# Altium PCB 风扇控制原理图.PcbDoc
Units mm, origin at the board's own origin, x right, y up, seen from the top; angles counter-clockwise.
Board outline 146.3 x 96.52 mm, 2 copper layers (Top Layer, Bottom Layer); 38 components, 56 nets, 160 pads, 16 vias.
Unrouted connection lines stored in the file: 4.
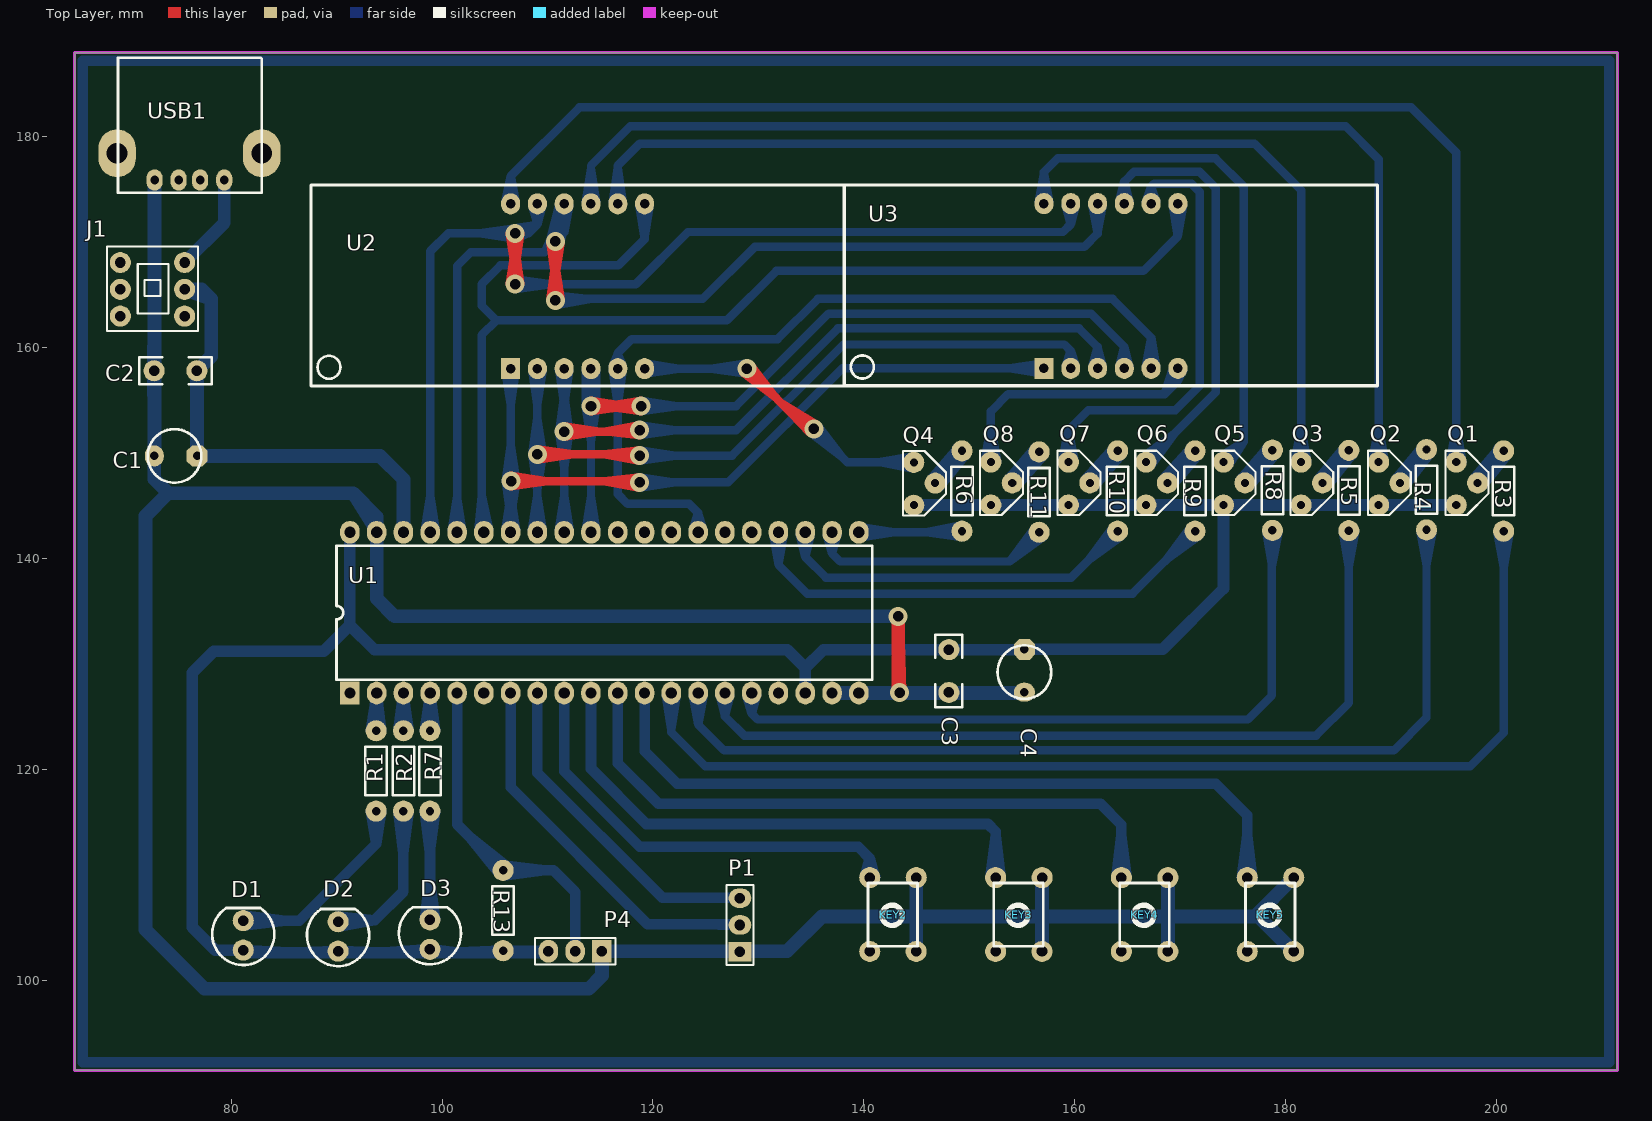
[diagram p0: Top Layer view]
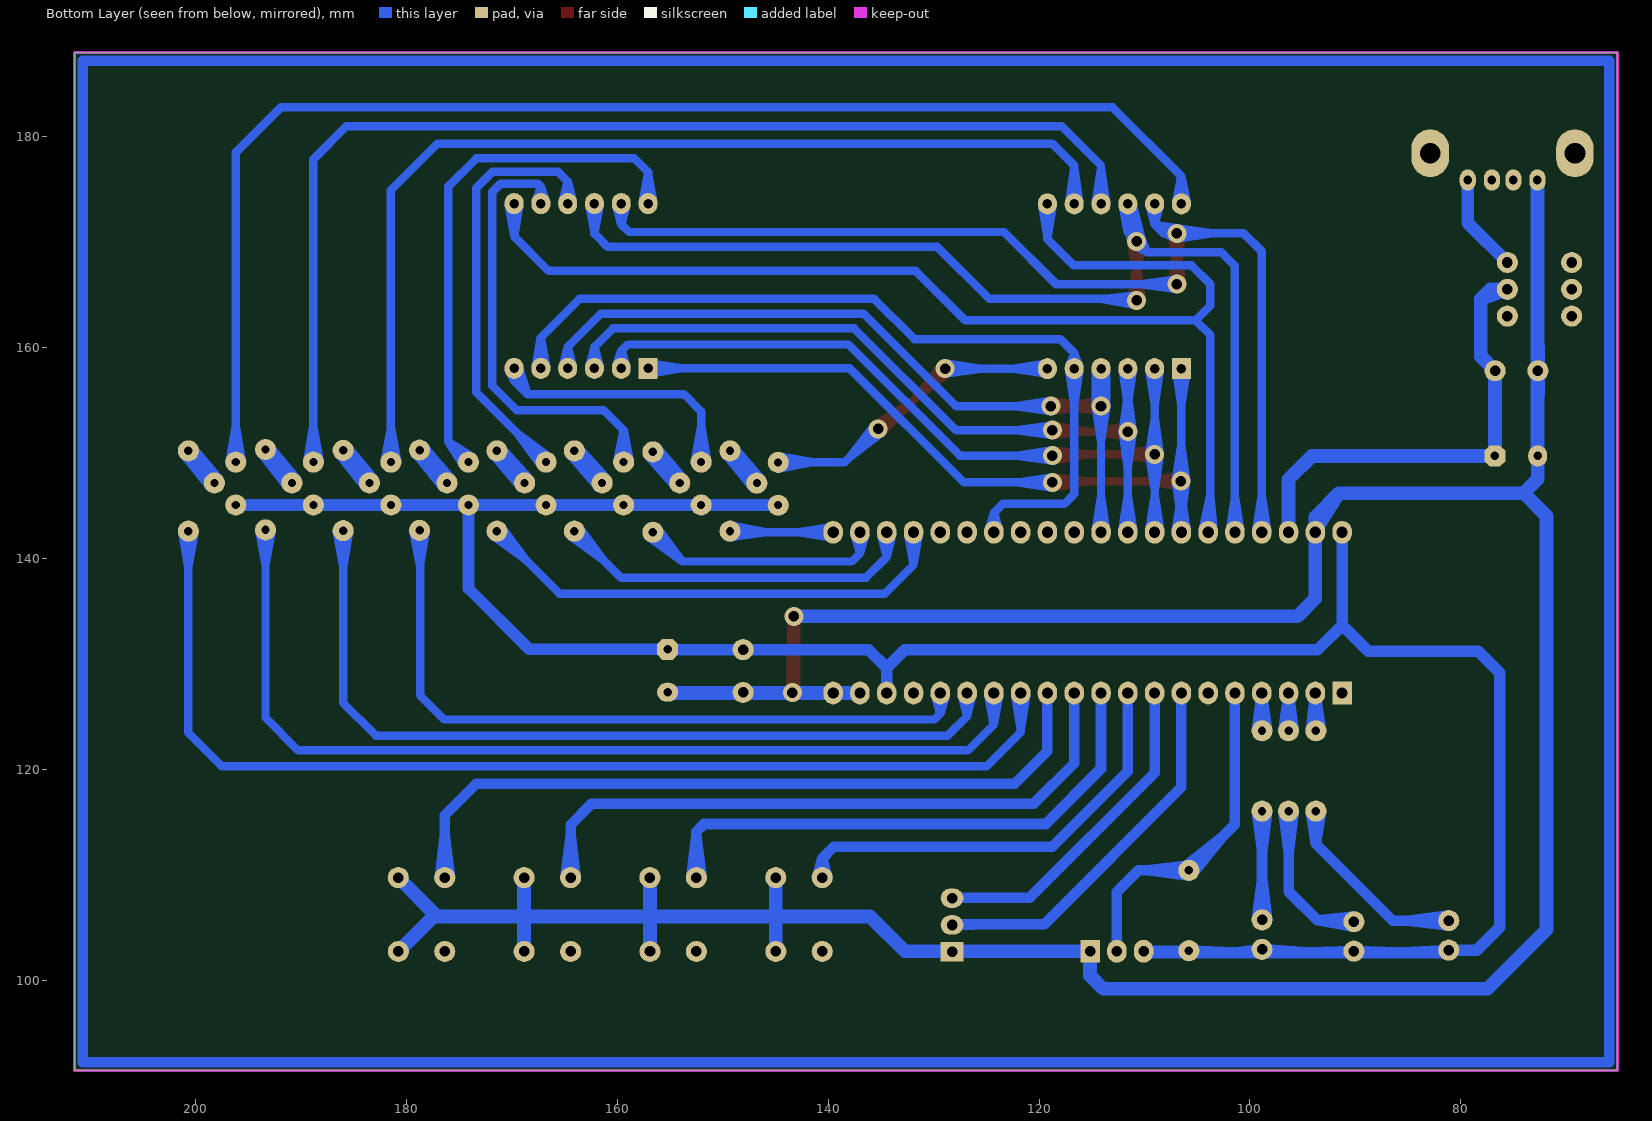
[diagram p1: Bottom Layer view, seen from below]

## Layer stack, top to bottom
Top Layer: signal copper 0.0356
Dielectric: dielectric 0.32, FR-4, Dk 4.8
Bottom Layer: signal copper 0.0356

## Board outline
65.151,91.44 65.151,187.96 211.455,187.96 211.455,91.44

## Design rules (kind name [scope] priority, off if disabled: settings)
Clearance [All] p1: gap=0.2
PolygonConnect [All] p1: connectstyle=Relief reliefconductorwidth=0.254 reliefentries=4 polygonreliefangle="90 Angle"
RoomDefinition 风扇控制原理图 [InComponentClass('风扇控制原理图')] p1: confinementstyle=ConfineIn formatcopy=TRUE lockcomponents=FALSE outline 0,0 50.8,0 50.8,25.4 0,25.4
RoutingCorners [All] p1: cornerstyle=45-Degree minsetback=0.4 maxsetback=0.4
RoutingVias [All] p1: holewidth=0.711 width=1.27 viastyle="Through Hole" minholewidth=0.711 minwidth=1.27 maxholewidth=0.711 maxwidth=1.27
SilkscreenOverComponentPads [All] p1: minsilkscreentomaskgap=0.254
SolderMaskExpansion [All] p1: expansion=0.102
TestPointUsage [All] p1: valid=0 allowmultiple=FALSE
Testpoint [All] p1: side=15 testpointundercomponent=TRUE minsize=1.016 maxsize=2.54 preferedsize=1.524 minholesize=0 maxholesize=1.016 preferedholesize=0.813 testpointgrid=0.025 style=1023 order=0-112345678
Width [All] p1: maxlimit=2 minlimit=0.6 preferedwidth=0.8
22 further rules are at their usual default settings.

## Components (designator, comment, footprint, x,y, rotation, side; value= is the part's Value field where it differs from the comment)
C1 "Cap" CAP-电解电容3.5 74.651,149.631 r180 top
C2 "C" CAP-瓷片电容 74.752,157.886 r180 top
C3 "C" CAP-瓷片电容 147.955,129.337 r270 top
C4 "Cap" CAP-电解电容3.5 155.296,129.235 r270 top
D1 "LED_5" LED-5MM 81.229,104.318 r270 top
D2 "LED_5" LED-5MM 90.221,104.216 r270 top
D3 "LED_5" LED-5MM 98.933,104.394 r270 top
J1 "SW" 8X8自锁开关 72.466,165.532 r180 top
KEY2 "BUTTON" KEY 142.723,106.147 r180 top
KEY3 "BUTTON" KEY 154.652,106.147 r180 top
KEY4 "BUTTON" KEY 166.582,106.147 r180 top
KEY5 "BUTTON" KEY 178.511,106.147 r180 top
P1 "风扇驱动" HEADER-3 128.245,105.232 r90 top
P4 "DS18B20" HEADER-3 112.624,102.743 r180 top
Q1 "NPN" TO-92 196.672,147.091 r270 top
Q2 "NPN" TO-92 189.317,147.091 r270 top
Q3 "NPN" TO-92 181.962,147.091 r270 top
Q4 "NPN" TO-92 145.237,147.066 r270 top
Q5 "NPN" TO-92 174.607,147.091 r270 top
Q6 "NPN" TO-92 167.252,147.091 r270 top
Q7 "NPN" TO-92 159.897,147.091 r270 top
Q8 "NPN" TO-92 152.542,147.091 r270 top
R1 "R" RES 93.701,119.863 r270 top
R2 "R" RES 96.291,119.863 r270 top
R3 "R" RES 200.609,146.406 r270 top
R4 "R" RES 193.294,146.533 r270 top
R5 "R" RES 186.03,146.406 r90 top
R6 "R" RES 149.352,146.355 r90 top
R7 "R" RES 98.806,119.863 r270 top
R8 "R" RES 178.689,146.482 r270 top
R9 "R" RES 171.348,146.406 r270 top
R10 "R" RES 164.109,146.355 r90 top
R11 "R" RES 156.667,146.253 r90 top
R13 "R" RES 105.74,106.629 r270 top
U1 "STM32F103C8T6" DIP40 115.24,135.077 r0 top
U2 "数码管" 0.56寸四位数码管 112.751,167.513 r0 top locked
U3 "数码管" 0.56寸四位数码管 163.322,167.538 r0 top locked
USB1 "USB" USB母座 76.048,180.188 r0 top

## Footprints (in the part's own frame and the unit in brackets; to place one, negate y for a bottom-side part, rotate by r counter-clockwise, add the part's x,y. Pads: shape width x height; smd on the part's side, far side on the other; paste and mask are expansions set on the pad)
0.56寸四位数码管 [mm]
  rect 1.8x2 hole 0.9: 1(-6.248,-9.525)
  oval 1.8x2 hole 0.9: 2(-3.708,-9.525) 3(-1.168,-9.525) 4(1.372,-9.525) 5(3.912,-9.525) 6(6.452,-9.525) 7(6.452,6.096) 8(3.912,6.096) 9(1.372,6.096) 10(-1.168,6.096) 11(-3.708,6.096) 12(-6.248,6.096)
  silkscreen extent -25.17,-11.18 25.37,7.87
8X8自锁开关 [mm]
  round 2 hole 1: 1(-3.124,2.565) 2(-3.124,0.025) 3(-3.124,-2.515) 4(2.972,-2.515) 5(2.972,0.025) 6(2.972,2.565)
  silkscreen extent -4.39,-4.04 4.24,3.96
CAP-瓷片电容 [mm]
  round 2 hole 1: 1(-2.007,0.102) 2(2.057,0.102)
  silkscreen extent -3.4,-1.17 3.45,1.37
CAP-电解电容3.5 [mm]
  oct 2x2 hole 0.8: 1(-2.134,-0.076)
  oval 1.8x2 hole 0.8: 2(1.93,-0.076)
  silkscreen extent -2.52,-2.62 2.57,2.46
DIP40 [mil]
  rect 72.83x84.65 hole 42: 1(-944,-309)
  oval 72.83x84.65 hole 42: 2(-844,-309) 3(-744,-309) 4(-644,-309) 5(-544,-309) 6(-444,-309) 7(-344,-309) 8(-244,-309) 9(-144,-309) 10(-44,-309) 11(56,-309) 12(156,-309) 13(256,-309) 14(356,-309) 15(456,-309) 16(556,-309) 17(656,-309) 18(756,-309) 19(856,-309) 20(956,-309) 21(956,291) 22(856,291) 23(756,291) 24(656,291) 25(556,291) 26(456,291) 27(356,291) 28(256,291) 29(156,291) 30(56,291) 31(-44,291) 32(-144,291) 33(-244,291) 34(-344,291) 35(-444,291) 36(-544,291) 37(-644,291) 38(-744,291) 39(-844,291) 40(-944,291)
  silkscreen extent -994,-259 1006,241
HEADER-3 [mm]
  rect 1.85x2.15 hole 1: 1(-2.54,0)
  oval 1.85x2.15 hole 1: 2(0,0) 3(2.54,0)
  silkscreen extent -3.81,-1.27 3.81,1.27
KEY [mm]
  round 2 hole 1: 1(-2.245,-3.576) 1(-2.235,3.424) 2(2.165,3.424) 2(2.165,-3.576)
  silkscreen extent -2.36,-3.07 2.34,2.93
LED-5MM [mm]
  round 2 hole 1: 1(1.467,-0.079) 2(-1.327,-0.079)
  silkscreen extent -2.53,-3.02 2.89,2.87
RES [mm]
  round 2 hole 0.8: 1(-3.785,0.051) 2(3.835,0.051)
  silkscreen extent -2.26,-0.97 2.31,1.07
TO-92 [mil]
  round 78.74 hole 30: 1(-80,-20) 2(-2.2,60) 3(80,-20)
  silkscreen extent -122,-60 118,100
USB母座 [mil]
  oval 60x78.74 hole 32: 1(130,-170) 2(40,-170) 3(-40,-170) 4(-130,-170)
  oval 139.37x178.74 hole 78: 5(-270,-70) 6(270,-70)
  silkscreen extent -266,-218 270,286

## Part data
P1 P4: library part "Header 3", "Header, 3-Pin"
U1: library part STC89C52
U2 U3: library part 四位共阳数码管

## Via types
v1: diameter 1.8, hole 1, Top Layer to Bottom Layer, 16 vias

## Nets (pads, with @x,y where several pads share a name; then routed paths per layer and width w, separated by ;. In a path a pad name is that pad's centre, name@x,y a point inside that pad or via, vN(x,y) a via of type N, cw(c..) or ccw(c..) an arc to the next point about the centre after c; other vN are vias at no path point)
3V3: C3.1 C4.1 D1.1 D2.1 D3.1 P4.3 Q1.3 Q2.3 Q3.3 Q4.3 Q5.3 Q6.3 Q7.3 Q8.3 R13.2 U1.18 U1.40 | length 290.9
  Bottom Layer w1.1: 85.472,102.616 D1.1 ; 85.834,102.616 D2.1 94.449,102.616 ; 91.262,138.094 U1.40@91.262,142.319 ; U1.40 91.262,133.655 ; 94.511,102.616 D3.1 101.346,102.616 ; 101.482,102.616 R13.2 P4.3@109.957,102.616 ; 103.505,102.616 101.346,102.616 ; R13.2@105.851,102.616 P4.3 ; R13.2@105.851,102.791 P4.3 ; U1.18 134.442,129.616 ; U1.18@134.442,127.379 134.442,129.616 ; 149.029,145.059 Q4.3 144.755,145.059 Q8.3 Q7.3 Q6.3 Q5.3 ; 150.919,131.343 C4.1 ; Q1.3 Q2.3 Q3.3 Q5.3 ; 78.505,102.851 76.327,105.029 76.327,129.159 78.359,131.191 88.798,131.191 91.262,133.655 ; 78.505,102.851 D1.1 ; 78.505,102.851 D1.1@80.791,102.851 ; D1.1@80.791,102.851 81.026,102.616 101.346,102.616 ; D1.1@80.791,102.851 D1.1 ; 91.262,133.655 93.599,131.318 132.74,131.318 134.442,129.616 ; 101.346,102.616 P4.3@109.957,102.616 ; P4.3@109.957,102.616 P4.3 ; 134.442,129.616 136.169,131.343 C3.1 155.194,131.343 C4.1 ; C4.1 168.326,131.369 174.099,137.142 Q5.3
GND: C1.2 C2.2 C3.2 C4.2 KEY2.1 KEY3.1 KEY4.1 KEY5.1 P1.1 P4.1 U1.19 U1.20 U1.39 USB1.4 | length 417
  Top Layer w1.3: v1@143.256,127.381 v1(143.256,134.493) ; 143.256,132.162 v1(143.383,127.254)
  Bottom Layer w1.3: C1.2@72.72,149.608 72.72,147.498 ; C1.2 72.72,147.498 ; C1.2@72.72,149.808 72.746,154.608 ; C1.2@72.746,149.708 USB1.4 ; 72.746,152.884 C2.2 72.746,162.686 ; 72.746,170.97 USB1.4@72.746,175.632 ; 93.802,137.494 U1.39@93.802,142.319 ; P4.1@115.164,102.593 115.164,100.432 ; 123.269,102.743 P1.1@128.095,102.692 ; P1.1@128.395,102.692 132.715,102.743 ; U1.19 U1.20 ; v1@143.156,127.229 C3.2 ; v1(143.256,134.493) 95.504,134.493 93.802,136.195 U1.39 93.802,143.942 ; KEY2.1@144.958,102.723 144.968,106.045 ; KEY2.1@144.968,102.733 144.968,106.045 ; KEY2.1@144.968,109.723 144.968,106.045 ; C3.2@148.285,127.229 v1(143.383,127.254) ; 150.317,127.229 C4.2@155.119,127.305 ; 152.958,127.229 C3.2 ; C4.2 155.143,127.229 U1.20 ; KEY3.1@156.887,102.723 156.897,106.045 ; KEY3.1@156.897,102.733 156.897,106.045 ; KEY3.1@156.897,109.723 156.897,106.045 ; KEY4.1@168.827,109.723 168.827,106.045 ; KEY5.1@180.487,109.992 KEY5.1@180.756,109.723 ; 72.72,147.498 74.041,146.177 ; 74.041,146.177 71.882,144.018 71.882,104.775 77.47,99.187 113.919,99.187 115.164,100.432 ; 74.041,146.177 91.567,146.177 ; 91.567,146.177 U1.39@93.802,142.619 ; 91.567,146.177 93.802,143.942 ; U1.39@93.802,142.619 93.802,143.942 ; U1.39@93.802,142.619 93.802,143.942 ; 115.164,100.432 P4.1 132.715,102.743 ; 132.715,102.743 136.017,106.045 144.968,106.045 ; U1.20 v1(143.383,127.254) ; v1(143.383,127.254) C3.2 ; 144.968,106.045 156.897,106.045 ; 156.897,106.045 168.827,106.045 ; 168.827,106.045 168.817,102.723 168.827,102.733 168.827,106.045 ; 168.827,106.045 177.079,106.045 ; 177.079,106.045 KEY5.1@180.756,109.723 ; 177.079,106.045 177.424,106.045 ; 177.079,106.045 KEY5.1@180.756,109.723 ; 177.424,106.045 180.746,102.723 177.424,106.045
NetD1_2: D1.2 R1.2 | length 32.9
  Bottom Layer w1: D1.2 86.468,105.645 93.751,112.928 ; D1.2@81.181,105.146 85.15,105.645 D1.2@81.181,106.144 ; R1.2@93.253,115.987 93.751,112.928 ; R1.2 93.751,112.928 ; R1.2@94.25,115.987 93.751,112.928
NetD2_2: D2.2 R2.2 | length 38.3
  Bottom Layer w1: D2.2@90.16,106.043 93.599,105.664 ; D2.2@90.195,105.046 93.599,105.664 ; R2.2@95.843,115.996 96.342,112.027 R2.2@96.841,115.996 ; R2.2@95.848,115.951 96.342,114.376 ; R2.2@96.836,115.951 96.342,114.376 ; 93.599,105.664 D2.2 90.262,105.664 93.599,105.664 ; 93.599,105.664 96.342,108.407 R2.2 96.342,114.376
NetD3_2: D3.2 R7.2 | length 31
  Bottom Layer w1: D3.2@98.355,105.753 98.857,109.721 ; R7.2@98.358,115.995 98.857,112.141 ; 98.857,111.176 98.857,112.141 ; R7.2 98.857,112.141 ; D3.2@99.353,105.752 98.857,109.721 ; R7.2@99.356,115.995 98.857,112.141 ; 98.857,109.721 D3.2 98.857,105.724 98.857,112.141
NetJ1_3: J1.3 USB1.1 | length 13.2
  Bottom Layer w1.2: J1.3 79.35,171.806 ; USB1.1@79.35,175.632 79.35,171.806 ; USB1.1 79.35,171.806
NetQ1_1: Q1.1 U2.12 | length 140.5
  Bottom Layer w0.8: U2.12@106.005,173.759 106.502,176.225 ; U2.12 106.502,176.225 ; U2.12@106.502,173.709 106.502,176.225 ; U2.12@107,173.759 106.502,176.225 ; Q1.1@195.567,149.176 196.164,152.523 Q1.1@196.762,149.176 ; Q1.1 196.164,178.486 191.897,182.753 113.03,182.753 106.502,176.225
NetQ1_2: Q1.2 R3.1 | length 55.3
  Bottom Layer w0.8: Q1.2@197.705,147.492 R3.1@199.99,150.22 ; Q1.2@197.762,147.562 R3.1@200.517,150.012 ; Q1.2@197.81,147.607 R3.1@200.66,149.611 ; Q1.2@197.83,147.623 R3.1@200.973,149.667 ; Q1.2@198.634,146.737 R3.1@200.973,149.667 ; Q1.2@198.655,146.761 R3.1@200.66,149.611 ; Q1.2@198.692,146.809 R3.1@200.517,150.012 ; Q1.2@198.738,146.89 R3.1@199.99,150.22 ; R3.1@200.163,150.527 Q1.2@198.318,147.269 ; R3.1@201.097,149.779 Q1.2@198.318,147.269 ; Q1.2 R3.1@200.517,150.012 ; Q1.2 R3.1@199.99,150.22 ; Q1.2 R3.1@200.973,149.667 ; Q1.2 R3.1@200.66,149.611 ; Q1.2@198.318,147.269 R3.1 R3.1@200.66,149.611
NetQ2_1: Q2.1 U2.9 | length 126.6
  Bottom Layer w0.8: U2.9@113.624,173.747 114.122,177.009 ; U2.9 114.122,177.241 117.856,180.975 185.674,180.975 188.809,177.84 Q2.1 ; U2.9@114.122,173.709 114.122,177.009 ; U2.9@114.621,173.747 114.122,177.009 ; Q2.1@188.211,149.176 188.809,152.523 Q2.1@189.407,149.176
NetQ2_2: Q2.2 R4.1 | length 55.6
  Bottom Layer w0.8: Q2.2@190.348,147.49 R4.1@192.615,150.228 ; Q2.2@190.403,147.557 R4.1@193.121,150.029 ; Q2.2@190.454,147.606 R4.1@193.345,149.651 ; Q2.2@190.467,147.616 R4.1@193.591,149.729 ; Q2.2@191.285,146.744 R4.1@193.591,149.729 ; Q2.2@191.3,146.761 R4.1@193.345,149.651 ; Q2.2@191.34,146.815 R4.1@193.121,150.029 ; Q2.2@191.384,146.893 R4.1@192.615,150.228 ; R4.1@192.843,150.646 Q2.2@191.041,147.348 ; R4.1@193.788,149.913 Q2.2@191.041,147.348 ; Q2.2 R4.1@193.121,150.029 ; Q2.2 R4.1@192.615,150.228 ; Q2.2 R4.1@193.591,149.729 ; Q2.2 R4.1@193.345,149.651 ; Q2.2@191.041,147.348 R4.1 R4.1@193.345,149.651
NetQ3_1: Q3.1 U2.8 | length 113.6
  Bottom Layer w0.8: U2.8@116.164,173.747 116.662,177.009 ; U2.8 116.662,177.241 118.745,179.324 177.038,179.324 181.454,174.908 Q3.1 ; U2.8@116.662,173.709 116.662,177.009 ; U2.8@117.161,173.747 116.662,177.009 ; Q3.1@180.856,149.176 181.454,152.523 Q3.1@182.052,149.176
NetQ3_2: Q3.2 R5.2 | length 55.4
  Bottom Layer w0.8: Q3.2@182.995,147.493 R5.2@185.281,150.22 ; Q3.2@183.051,147.561 R5.2@185.799,150.015 ; Q3.2@183.099,147.606 R5.2@185.979,149.64 ; Q3.2@183.117,147.621 R5.2@186.256,149.684 ; Q3.2@183.925,146.739 R5.2@186.256,149.684 ; Q3.2@183.945,146.761 R5.2@185.979,149.64 ; Q3.2@183.982,146.81 R5.2@185.799,150.015 ; Q3.2@184.028,146.889 R5.2@185.281,150.22 ; R5.2@185.481,150.576 Q3.2@183.646,147.307 ; R5.2@186.417,149.831 Q3.2@183.646,147.307 ; Q3.2 R5.2@185.799,150.015 ; Q3.2 R5.2@185.281,150.22 ; Q3.2 R5.2@186.256,149.684 ; Q3.2 R5.2@185.979,149.64 ; Q3.2@183.646,147.307 R5.2 R5.2@185.979,149.64
NetQ4_1: Q4.1 U2.6 | length 83.9
  Top Layer w0.8: v1@128.575,157.612 131.604,155.289 v1@129.281,158.318 ; v1(128.905,157.988) 134.62,152.273 v1(135.255,152.273) 132.235,154.658 ; v1@134.92,151.902 132.235,154.658 ; v1@135.539,152.685 132.235,154.658
  Bottom Layer w0.8: U2.6 v1(128.905,157.988) 125.503,157.988 ; U2.6@119.24,157.489 122.502,157.988 U2.6@119.24,158.487 ; v1@128.868,157.489 125.503,157.988 ; v1@128.868,158.487 125.503,157.988 ; v1@134.925,151.897 137.954,149.574 v1@135.631,152.603 ; v1(135.255,152.273) 138.405,149.123 Q4.1@143.764,149.123 ; Q4.1@144.672,148.501 141.323,149.123 ; Q4.1@144.678,149.123 Q4.1@143.764,149.123 ; Q4.1@144.681,149.696 141.323,149.123 ; 141.323,149.123 Q4.1 Q4.1@143.764,149.123
NetQ4_2: Q4.2 R6.2 | length 55.6
  Bottom Layer w0.8: Q4.2@146.275,147.474 R6.2@148.603,150.178 ; Q4.2@146.332,147.541 R6.2@149.121,149.97 ; Q4.2@146.374,147.58 R6.2@149.301,149.662 ; Q4.2@146.399,147.6 R6.2@149.551,149.613 ; Q4.2@147.195,146.708 R6.2@149.551,149.613 ; Q4.2@147.219,146.735 R6.2@149.301,149.662 ; Q4.2@147.253,146.778 R6.2@149.121,149.97 ; Q4.2@147.299,146.857 R6.2@148.603,150.178 ; R6.2@148.808,150.532 Q4.2@146.93,147.291 ; R6.2@149.734,149.774 Q4.2@146.93,147.291 ; Q4.2 R6.2@149.121,149.97 ; Q4.2 R6.2@148.603,150.178 ; Q4.2 R6.2@149.551,149.613 ; Q4.2 R6.2@149.301,149.662 ; Q4.2@146.93,147.291 R6.2 R6.2@149.301,149.662
NetQ5_1: Q5.1 U3.12 | length 64.7
  Bottom Layer w0.8: U3.12@156.575,173.778 157.074,176.632 ; U3.12 157.074,176.632 ; U3.12@157.074,173.734 157.074,176.632 ; U3.12@157.572,173.778 157.074,176.632 ; Q5.1@173.724,149.592 176.022,151.047 ; Q5.1 176.022,151.047 ; Q5.1@174.567,148.749 176.022,151.047 ; 157.074,176.632 158.369,177.927 173.355,177.927 176.022,175.26 176.022,151.047
NetQ5_2: Q5.2 R8.1 | length 60
  Bottom Layer w0.8: Q5.2@175.644,147.498 R8.1@177.988,150.245 ; Q5.2@175.766,147.624 R8.1@178.949,149.68 ; Q5.2@176.566,146.734 R8.1@178.949,149.68 ; Q5.2@176.669,146.883 R8.1@177.988,150.245 ; R8.1@178.282,150.655 Q5.2@176.131,147.657 ; R8.1@179.128,149.809 Q5.2@176.131,147.657 ; Q5.2 R8.1@178.513,150.04 ; Q5.2 R8.1@177.988,150.245 ; Q5.2 R8.1@178.949,149.68 ; Q5.2 R8.1@178.513,150.04 ; Q5.2 Q5.2@176.131,147.657 ; Q5.2@176.131,147.657 R8.1 Q5.2@176.131,147.657 ; R8.1@178.513,150.04 176.623,146.804 R8.1@178.513,150.04 ; R8.1@178.513,150.04 175.7,147.565 R8.1@178.513,150.04
NetQ6_1: Q6.1 U3.9 | length 54.2
  Bottom Layer w0.8: U3.9@164.197,173.797 164.694,175.743 ; U3.9 164.694,175.743 ; U3.9@164.694,173.734 164.694,175.743 ; U3.9@165.19,173.797 164.694,175.743 ; Q6.1@166.354,149.58 169.441,151.82 Q6.1@167.2,148.734 ; Q6.1 173.355,155.735 173.355,175.133 171.831,176.657 165.608,176.657 164.694,175.743
NetQ6_2: Q6.2 R9.1 | length 55.9
  Bottom Layer w0.8: Q6.2@168.297,147.509 R9.1@170.691,150.176 ; Q6.2@168.355,147.575 R9.1@171.206,149.964 ; Q6.2@168.387,147.605 R9.1@171.399,149.771 ; Q6.2@168.423,147.632 R9.1@171.595,149.572 ; Q6.2@169.202,146.726 R9.1@171.595,149.572 ; Q6.2@169.233,146.759 R9.1@171.399,149.771 ; Q6.2@169.26,146.793 R9.1@171.206,149.964 ; Q6.2@169.308,146.87 R9.1@170.691,150.176 ; R9.1@170.913,150.542 Q6.2@168.967,147.339 ; R9.1@171.823,149.766 Q6.2@168.967,147.339 ; Q6.2 R9.1@171.206,149.964 ; Q6.2 R9.1@171.595,149.572 ; Q6.2 R9.1@170.691,150.176 ; Q6.2 R9.1@171.399,149.771 ; Q6.2@168.967,147.339 R9.1 R9.1@171.399,149.771
NetQ7_1: Q7.1 U3.8 | length 52.8
  Bottom Layer w0.8: Q7.1@158.792,149.183 159.389,152.15 ; Q7.1 159.389,152.15 ; Q7.1@159.986,149.183 159.389,152.15 ; U3.8@166.741,173.818 167.234,175.235 ; U3.8 167.234,175.235 ; U3.8@167.234,173.734 167.234,175.235 ; U3.8@167.727,173.818 167.234,175.235 ; 159.389,152.15 161.29,154.051 169.545,154.051 171.831,156.337 171.831,174.752 171.069,175.514 167.513,175.514 167.234,175.235
NetQ7_2: Q7.2 R10.2 | length 55.9
  Bottom Layer w0.8: Q7.2@160.943,147.511 R10.2@163.346,150.172 ; Q7.2@161.001,147.576 R10.2@163.861,149.96 ; Q7.2@161.032,147.604 R10.2@164.059,149.785 ; Q7.2@161.069,147.633 R10.2@164.244,149.564 ; Q7.2@161.846,146.725 R10.2@164.244,149.564 ; Q7.2@161.878,146.759 R10.2@164.059,149.785 ; Q7.2@161.904,146.792 R10.2@163.861,149.96 ; Q7.2@161.952,146.869 R10.2@163.346,150.172 ; R10.2@163.573,150.543 Q7.2@161.618,147.345 ; R10.2@164.481,149.764 Q7.2@161.618,147.345 ; Q7.2 R10.2@163.861,149.96 ; Q7.2 R10.2@163.346,150.172 ; Q7.2 R10.2@164.244,149.564 ; Q7.2 R10.2@164.059,149.785 ; Q7.2@161.618,147.345 R10.2 R10.2@164.059,149.785
NetQ8_1: Q8.1 U3.6 | length 46.3
  Bottom Layer w0.8: Q8.1@151.436,149.176 152.034,152.523 Q8.1@152.631,149.176 ; Q8.1 152.034,153.939 153.67,155.575 168.529,155.575 ; U3.6@169.312,158.106 168.529,155.575 ; U3.6 169.774,156.82 ; U3.6@170.191,157.638 168.529,155.575 ; 168.529,155.575 U3.6@169.774,157.913 ; 168.529,155.575 169.774,156.82 ; 169.774,156.82 U3.6@169.774,157.913 ; 169.774,156.82 169.287,157.799 169.774,156.82 ; 169.774,156.82 170.26,157.799 169.774,156.82 ; 169.774,156.82 U3.6@169.774,157.913
NetQ8_2: Q8.2 R11.2 | length 44.5
  Bottom Layer w0.8: Q8.2@153.678,147.605 R11.2@156.616,149.698 ; Q8.2 R11.2@156.616,149.698 ; Q8.2@154.524,146.76 R11.2@156.616,149.698 ; R11.2@156.082,150.362 Q8.2@154.716,147.03 ; R11.2@156.132,150.443 Q8.2@154.17,147.252 ; R11.2@156.193,150.513 Q8.2@153.767,147.669 ; R11.2@156.967,149.602 Q8.2@153.767,147.669 ; R11.2@157.038,149.662 Q8.2@154.17,147.252 ; R11.2@157.098,149.731 Q8.2@154.716,147.03 ; Q8.2@153.767,147.669 R11.2 ; Q8.2@154.17,147.252 R11.2 ; Q8.2@154.716,147.03 R11.2 ; R11.2@156.616,149.698 R11.2
PA0: P4.2 R13.1 U1.5 | length 61
  Bottom Layer w1: 101.422,123.154 U1.5@101.422,127.079 ; U1.5 101.422,114.783 R13.1 ; R13.1@105.418,110.081 102.67,113.535 ; R13.1@105.822,109.915 109.791,110.414 R13.1@105.822,110.913 ; R13.1@106.124,110.787 102.67,113.535 ; P4.2 112.624,108.356 110.566,110.414 R13.1 ; P4.2@112.624,102.893 112.624,106.818 ; 102.67,113.535 R13.1
PA1: U1.6
PA2: P1.2 U1.7 | length 45.6
  Bottom Layer w1: 106.502,123.154 U1.7@106.502,127.079 ; U1.7 106.502,118.288 119.507,105.283 122.428,105.283 ; 124.13,105.283 122.428,105.283 ; 124.169,105.283 P1.2@128.095,105.232 ; P1.2 128.194,105.283 122.428,105.283
PA3: P1.3 U1.8 | length 41
  Bottom Layer w1: 109.042,123.154 U1.8@109.042,127.079 ; U1.8 109.042,119.685 120.904,107.823 122.682,107.823 ; 124.13,107.823 122.682,107.823 ; 124.169,107.823 P1.3@128.095,107.772 ; P1.3 128.194,107.823 122.682,107.823
PA4: KEY2.2 U1.9 | length 49.2
  Bottom Layer w1: 111.582,123.154 U1.9@111.582,127.079 ; U1.9 111.582,119.812 118.745,112.649 139.446,112.649 140.558,111.537 ; KEY2.2@140.063,109.792 140.558,111.537 ; KEY2.2@140.558,109.723 140.558,111.537 ; KEY2.2@141.053,109.792 140.558,111.537
PA5: KEY3.2 U1.10 | length 64.3
  Bottom Layer w1: 114.122,123.154 U1.10@114.122,127.079 ; U1.10 114.122,120.066 119.38,114.808 151.765,114.808 152.487,114.086 KEY3.2@152.487,109.723 ; KEY3.2@151.988,109.754 152.487,113.723 KEY3.2@152.986,109.754
PA6: KEY4.2 U1.11 | length 73.8
  Bottom Layer w1: 116.662,123.154 U1.11@116.662,127.079 ; U1.11 116.662,120.574 120.523,116.713 162.433,116.713 164.417,114.729 KEY4.2@164.417,109.723 ; KEY4.2@163.918,109.754 164.417,113.723 KEY4.2@164.916,109.754
PA7: KEY5.2 U1.12 | length 83
  Bottom Layer w1: 119.202,123.154 U1.12@119.202,127.079 ; U1.12 119.202,121.717 122.301,118.618 173.355,118.618 176.346,115.627 KEY5.2@176.346,109.723 ; KEY5.2@175.847,109.754 176.346,113.723 KEY5.2@176.845,109.754
PA8: U1.25
PA9: U1.26
PA10: U1.27 U2.5 U3.5 | length 108.3
  Bottom Layer w0.8: U2.5@116.164,157.85 116.662,154.588 ; U2.5@116.171,158.179 116.662,159.461 ; U2.5@116.662,157.888 116.662,154.588 ; U2.5@116.662,158.088 116.662,159.461 ; U2.5@117.154,158.179 116.662,159.461 ; U2.5@117.161,157.85 116.662,154.588 ; U1.27@123.763,142.699 124.282,144.323 ; U1.27 124.282,144.323 ; U1.27@124.282,142.619 124.282,144.323 ; U1.27@124.801,142.699 124.282,144.323 ; U3.5@166.736,158.158 167.234,160.934 ; U3.5 167.234,160.934 ; U3.5@167.234,158.113 167.234,160.934 ; U3.5@167.732,158.158 167.234,160.934 ; 116.662,159.461 117.983,160.782 131.826,160.782 135.636,164.592 163.576,164.592 167.234,160.934 ; 116.662,159.461 U2.5 116.662,146.101 117.602,145.161 123.444,145.161 124.282,144.323
PA11: U1.28
PA12: U1.29
PA15: U1.30
PB0: R3.2 U1.13 | length 121.2
  Bottom Layer w0.8: U1.13@121.219,127.037 121.742,123.754 ; U1.13@121.742,127.079 121.742,123.754 ; U1.13 121.742,123.495 124.968,120.269 197.485,120.269 200.66,123.444 R3.2 ; U1.13@122.266,127.037 121.742,123.754 ; R3.2@200.062,142.517 200.66,139.17 R3.2@201.258,142.517
PB1: R4.2 U1.14 | length 107.4
  Bottom Layer w0.8: U1.14@123.759,127.03 124.282,124.257 ; U1.14@124.282,127.079 124.282,124.257 ; U1.14 124.282,124.257 ; U1.14@124.805,127.03 124.282,124.257 ; R4.2@192.747,142.644 193.345,139.297 R4.2@193.942,142.644 ; R4.2 193.345,124.892 190.246,121.793 126.746,121.793 124.282,124.257
PB3: U1.31 U2.4 U3.4 | length 163.4
  Top Layer w0.8: v1(114.122,154.432) v1(118.872,154.432) ; v1@114.159,153.933 117.524,154.432 v1@114.159,154.931 ; v1@118.835,153.933 115.47,154.432 v1@118.835,154.931
  Bottom Layer w0.8: U1.31@113.599,142.66 114.122,145.944 ; v1@113.624,154.395 114.122,151.03 v1@114.621,154.395 ; v1@113.623,154.396 U2.4@113.63,157.809 ; U2.4@113.624,157.85 v1@114.122,154.588 ; v1@113.634,154.54 U2.4@114.614,157.809 ; U1.31 U2.4 ; U1.31@114.122,142.619 114.122,145.944 ; U2.4@114.122,157.888 v1@114.122,154.588 ; v1@114.61,154.54 U2.4@113.63,157.809 ; v1@114.621,154.396 U2.4@114.614,157.809 ; U2.4@114.621,157.85 v1@114.122,154.588 ; U1.31@114.646,142.66 114.122,145.944 ; v1(118.872,154.432) 127.889,154.432 136.652,163.195 161.544,163.195 164.694,160.045 ; v1@118.909,153.933 122.274,154.432 v1@118.909,154.931 ; U3.4@164.198,158.178 164.694,160.045 ; U3.4 164.694,160.045 ; U3.4@164.694,158.113 164.694,160.045 ; U3.4@165.189,158.178 164.694,160.045 ; U2.4@113.63,157.809 v1(114.122,154.432) ; v1(114.122,154.432) U2.4@114.614,157.809 ; v1(114.122,154.432) U2.4@114.122,157.834 ; U2.4@114.122,157.834 114.621,154.469 U2.4@114.122,157.834 ; U2.4@114.122,157.834 113.624,154.469 U2.4@114.122,157.834
PB4: U1.32 U2.3 U3.3 | length 136
  Top Layer w0.8: v1(111.582,152.019) 118.618,152.019 v1(118.745,152.146) 115.337,152.019 ; v1@111.619,151.52 114.984,152.019 v1@111.619,152.518 ; v1@118.69,152.643 115.337,152.019 ; v1@118.727,151.646 115.337,152.019
  Bottom Layer w0.8: U1.32@111.059,142.66 111.582,145.944 ; v1@111.084,151.982 111.582,148.617 v1@112.081,151.982 ; v1@111.084,152.056 111.582,155.421 v1@112.081,152.056 ; U2.3@111.084,157.85 111.582,154.588 ; U1.32 U2.3 ; U1.32@111.582,142.619 111.582,145.944 ; U2.3@111.582,157.888 111.582,154.588 ; U2.3@112.081,157.85 111.582,154.588 ; U1.32@112.106,142.66 111.582,145.944 ; v1(118.745,152.146) 127.889,152.146 137.541,161.798 160.401,161.798 162.154,160.045 ; v1@118.782,151.647 122.147,152.146 v1@118.782,152.645 ; U3.3@161.658,158.178 162.154,160.045 ; U3.3 162.154,160.045 ; U3.3@162.154,158.113 162.154,160.045 ; U3.3@162.649,158.178 162.154,160.045
PB5: U1.33 U2.2 U3.2 | length 134.4
  Top Layer w0.8: v1(109.042,149.86) 118.618,149.86 v1(118.745,149.733) 115.336,149.86 ; v1@109.079,149.361 112.444,149.86 v1@109.079,150.359 ; v1@118.69,149.236 115.336,149.86 ; v1@118.727,150.233 115.336,149.86
  Bottom Layer w0.8: U1.33@108.519,142.66 109.042,145.944 ; v1@108.544,149.823 109.042,146.458 v1@109.541,149.823 ; v1@108.544,149.897 109.042,153.262 v1@109.541,149.897 ; U2.2@108.544,157.85 109.042,154.588 ; U1.33 U2.2 ; U1.33@109.042,142.619 109.042,145.944 ; U2.2@109.042,157.888 109.042,154.588 ; U2.2@109.541,157.85 109.042,154.588 ; U1.33@109.566,142.66 109.042,145.944 ; v1(118.745,149.733) 127.508,149.733 138.049,160.274 159.004,160.274 159.614,159.664 ; v1@118.782,149.234 122.147,149.733 v1@118.782,150.232 ; U3.2@159.12,158.194 159.614,159.664 ; U3.2 159.614,159.664 ; U3.2@159.614,158.113 159.614,159.664 ; U3.2@160.107,158.194 159.614,159.664
PB6: U1.34 U2.1 U3.1 | length 141.3
  Top Layer w0.8: v1(106.553,147.32) 118.618,147.32 v1(118.745,147.193) 115.336,147.32 ; v1@106.59,146.821 109.955,147.32 v1@106.59,147.819 ; v1@118.69,146.696 115.336,147.32 ; v1@118.727,147.693 115.336,147.32
  Bottom Layer w0.8: U1.34@105.979,142.66 106.502,145.944 ; U2.1@106.004,157.85 106.502,154.588 ; v1@106.054,147.291 106.502,143.918 ; v1@106.054,147.349 106.502,150.723 ; U1.34 U2.1 ; U1.34@106.502,142.619 106.502,145.944 ; U2.1@106.502,157.888 106.502,154.588 ; U2.1@107.001,157.85 106.502,154.588 ; U1.34@107.026,142.66 106.502,145.944 ; v1@107.051,147.276 106.502,143.918 ; v1@107.051,147.364 106.502,150.723 ; v1(118.745,147.193) 127.127,147.193 137.947,158.013 U3.1 ; v1@118.782,146.694 122.147,147.193 v1@118.782,147.692 ; U3.1@157.036,157.515 153.774,158.013 U3.1@157.036,158.512 ; 106.502,143.918 v1(106.553,147.32) 106.502,150.723
PB7: U1.35 U2.7 U3.7 | length 145.2
  Bottom Layer w0.8: U1.35@103.437,142.628 103.759,145.964 ; U1.35 103.759,142.672 103.759,161.163 105.156,162.56 ; U1.35@103.962,142.619 103.759,145.964 ; U1.35@104.482,142.691 103.759,145.964 ; U2.7@118.704,173.471 119.202,170.256 ; U2.7@119.202,173.509 119.202,170.256 ; U2.7 119.202,170.256 ; U2.7@119.701,173.471 119.202,170.256 ; U3.7@169.275,173.493 169.774,170.536 ; U3.7@169.774,173.534 169.774,170.536 ; U3.7 169.774,170.536 ; U3.7@170.272,173.493 169.774,170.536 ; 105.156,162.56 103.759,163.957 103.759,165.989 105.537,167.767 116.713,167.767 119.202,170.256 ; 105.156,162.56 127,162.56 131.699,167.259 166.497,167.259 169.774,170.536
PB8: U1.36 U2.10 U3.10 | length 199
  Top Layer w0.8: v1@110.245,164.502 110.744,167.867 v1@111.243,164.502 ; v1@110.245,170.016 110.744,166.651 v1@111.243,170.016 ; v1(110.744,164.465) v1(110.744,170.053)
  Bottom Layer w0.8: U1.36@100.899,142.66 101.422,145.944 ; U1.36 101.422,167.716 102.743,169.037 109.728,169.037 ; U1.36@101.422,142.619 101.422,145.944 ; U1.36@101.946,142.66 101.422,145.944 ; v1@110.251,170.139 U2.10@111.084,173.461 ; v1@110.266,170.201 U2.10 ; v1@110.268,170.205 U2.10@111.582,173.509 ; v1@110.292,170.267 U2.10@112.08,173.461 ; v1@110.334,170.34 109.728,169.037 ; v1@110.762,164.965 114.154,164.592 ; v1@110.799,163.968 114.154,164.592 ; v1@111.031,169.643 109.728,169.037 ; v1@111.221,169.903 U2.10@112.08,173.461 ; v1@111.237,169.97 U2.10@111.582,173.509 ; v1@111.237,169.972 U2.10 ; v1@111.244,170.04 U2.10@111.084,173.461 ; U3.10@161.656,173.489 162.154,170.79 ; U3.10@162.154,173.534 162.154,170.79 ; U3.10 162.154,170.79 ; U3.10@162.652,173.489 162.154,170.79 ; 109.728,169.037 v1(110.744,170.053) ; 109.728,169.037 v1(110.744,170.053) ; v1(110.744,170.053) U2.10@111.582,173.509 ; v1(110.744,170.053) U2.10@111.084,173.461 ; v1(110.744,170.053) U2.10@112.08,173.461 ; v1(110.744,170.053) U2.10 ; v1(110.744,170.053) 111.582,170.891 ; U2.10@111.084,173.461 111.582,170.891 ; 111.582,170.891 U2.10@111.582,173.509 ; 111.582,170.891 U2.10@112.08,173.461 ; 111.582,170.891 U2.10 ; 114.154,164.592 v1(110.744,164.465) 110.871,164.592 124.714,164.592 129.667,169.545 160.909,169.545 162.154,170.79
PB9: U1.37 U2.11 U3.11 | length 168.7
  Top Layer w0.8: v1@106.435,166.026 106.934,169.391 v1@107.433,166.026 ; v1@106.435,170.778 106.934,167.413 v1@107.433,170.778 ; v1(106.934,165.989) v1(106.934,170.815)
  Bottom Layer w0.8: U1.37@98.359,142.66 98.882,145.944 ; U1.37 98.882,169.113 100.584,170.815 v1(106.934,170.815) ; U1.37@98.882,142.619 98.882,145.944 ; U1.37@99.406,142.66 98.882,145.944 ; v1@106.802,171.297 109.042,171.653 ; v1@106.897,170.316 103.532,170.815 v1@106.897,171.314 ; v1(106.934,165.989) 118.364,165.989 123.317,170.942 158.877,170.942 159.614,171.679 ; v1@106.971,165.49 110.336,165.989 v1@106.971,166.488 ; v1@107.169,170.374 109.042,171.653 ; U2.11@108.547,173.442 109.042,171.653 ; 109.042,172.542 U2.11 109.042,171.653 ; U2.11@109.042,173.509 109.042,171.653 ; U2.11@109.538,173.442 109.042,171.653 ; U3.11@159.118,173.467 159.614,171.679 ; U3.11@159.127,173.42 159.614,172.441 ; U3.11@160.1,173.42 159.614,172.441 ; U3.11@160.109,173.467 159.614,171.679 ; v1(106.934,170.815) 108.204,170.815 ; v1(106.934,170.815) 109.042,171.653 ; v1(106.934,170.815) 108.204,170.815 ; 108.204,170.815 107.032,170.325 108.204,170.815 ; 108.204,170.815 107.032,171.305 108.204,170.815 ; 108.204,170.815 109.042,171.653 ; 159.614,171.679 159.614,173.534 159.614,172.441 ; 159.614,171.679 U3.11 159.614,172.441
PB10: R5.1 U1.15 | length 92.7
  Bottom Layer w0.8: U1.15@126.301,127.012 126.822,125.019 ; U1.15@126.822,127.079 126.822,125.019 ; U1.15 126.822,125.019 ; U1.15@127.343,127.012 126.822,125.019 ; R5.1@185.381,142.568 185.979,139.221 R5.1@186.576,142.568 ; R5.1 185.979,126.289 182.88,123.19 128.651,123.19 126.822,125.019
PB11: R8.2 U1.16 | length 83.8
  Bottom Layer w0.8: U1.16@128.843,127.002 129.362,125.273 ; U1.16@129.362,127.079 129.362,125.273 ; U1.16 129.362,125.273 ; U1.16@129.882,127.002 129.362,125.273 ; R8.2@178.141,142.602 178.689,139.245 ; R8.2@179.337,142.585 178.689,139.245 ; 129.362,125.273 129.921,124.714 176.403,124.714 178.689,127 178.689,142.596 R8.2 178.689,139.245
PB12: R6.1 U1.21 | length 27.8
  Bottom Layer w0.8: U1.21 145.415,142.469 ; U1.21@139.564,141.945 142.847,142.469 U1.21@139.564,142.992 ; 146.482,142.469 145.415,142.469 ; R6.1@149.231,143.166 145.898,142.469 ; R6.1@149.266,141.971 145.898,142.469 ; 145.415,142.469 149.2,142.469 R6.1 145.898,142.469
PB13: R11.1 U1.22 | length 36.3
  Bottom Layer w0.8: U1.22@136.462,142.244 136.982,140.462 ; U1.22@136.982,142.319 136.982,140.462 ; U1.22 136.982,140.462 ; U1.22@137.502,142.244 136.982,140.462 ; R11.1@156.16,142.858 153.919,139.772 R11.1@157.006,142.012 ; R11.1 153.848,139.7 137.744,139.7 136.982,140.462
PB14: R10.1 U1.23 | length 48.8
  Bottom Layer w0.8: U1.23@133.921,142.256 134.442,140.132 ; U1.23@134.442,142.319 134.442,140.132 ; U1.23 134.442,140.132 ; U1.23@134.963,142.256 134.442,140.132 ; R10.1@163.602,142.96 161.362,139.873 R10.1@164.448,142.114 ; R10.1 159.664,138.176 136.398,138.176 134.442,140.132
PB15: R9.2 U1.24 | length 62.6
  Bottom Layer w0.8: U1.24@131.379,142.272 131.902,139.37 ; U1.24@131.902,142.319 131.902,139.37 ; U1.24 131.902,139.37 ; U1.24@132.425,142.272 131.902,139.37 ; R9.2@170.943,142.96 168.702,139.873 R9.2@171.789,142.114 ; R9.2 165.481,136.652 134.62,136.652 131.902,139.37
PC13: R1.1 U1.2 | length 28
  Bottom Layer w1: U1.2@93.802,127.079 R1.1 U1.2 ; U1.2@93.802,127.079 94.251,123.675 U1.2 ; U1.2@93.802,127.079 93.253,123.689 U1.2 ; U1.2@93.802,127.079 93.802,123.698 U1.2
PC14: R2.1 U1.3 | length 21
  Bottom Layer w1: U1.3@96.342,127.079 95.843,123.682 U1.3 ; U1.3@96.342,127.079 96.841,123.682 U1.3 ; U1.3@96.342,127.079 R2.1 U1.3
PC15: R7.1 U1.4 | length 28
  Bottom Layer w1: R7.1 U1.4@98.882,127.079 ; R7.1 U1.4 ; R7.1 R7.1@98.882,123.673 ; R7.1@98.882,123.673 U1.4@98.882,127.079 ; R7.1@98.882,123.673 U1.4 ; U1.4@98.882,127.079 99.356,123.679 U1.4 ; U1.4@98.882,127.079 98.358,123.686 U1.4
RST: U1.17
VCC: C1.1 C2.1 J1.2 U1.38 | length 57.8
  Bottom Layer w1.3: 76.759,154.608 C1.1 ; U1.38 96.342,147.498 94.132,149.708 C1.1 ; U1.38@96.342,142.619 96.342,147.444 ; J1.2 77.191,165.506 ; J1.2 78.105,164.592 ; J1.2 77.191,165.506 ; C1.1 76.759,149.733 C2.1 78.105,159.131 78.105,164.592 ; 77.191,165.506 78.105,164.592
pads on no net: J1.1 J1.4 J1.5 J1.6 U1.1 USB1.2 USB1.3 USB1.5 USB1.6
copper on no net: | length 479.6
  Bottom Layer w1: 65.913,92.202 210.693,92.202 210.693,187.198 65.913,187.198 65.913,92.202

## Keep-outs
Keep-Out Layer:
  the board outline again, w0.3